# Altium PCB StepTMC5160.PcbDoc (part 3 of 3)
Units mm, origin at the board's own origin, x right, y up, seen from the top; angles counter-clockwise.
Board outline 109.42 x 88.01 mm, 4 copper layers (Component Side, GND, VCC, Bottom Layer), stack 0.778 mm thick; 190 components, 123 nets, 661 pads, 738 vias.
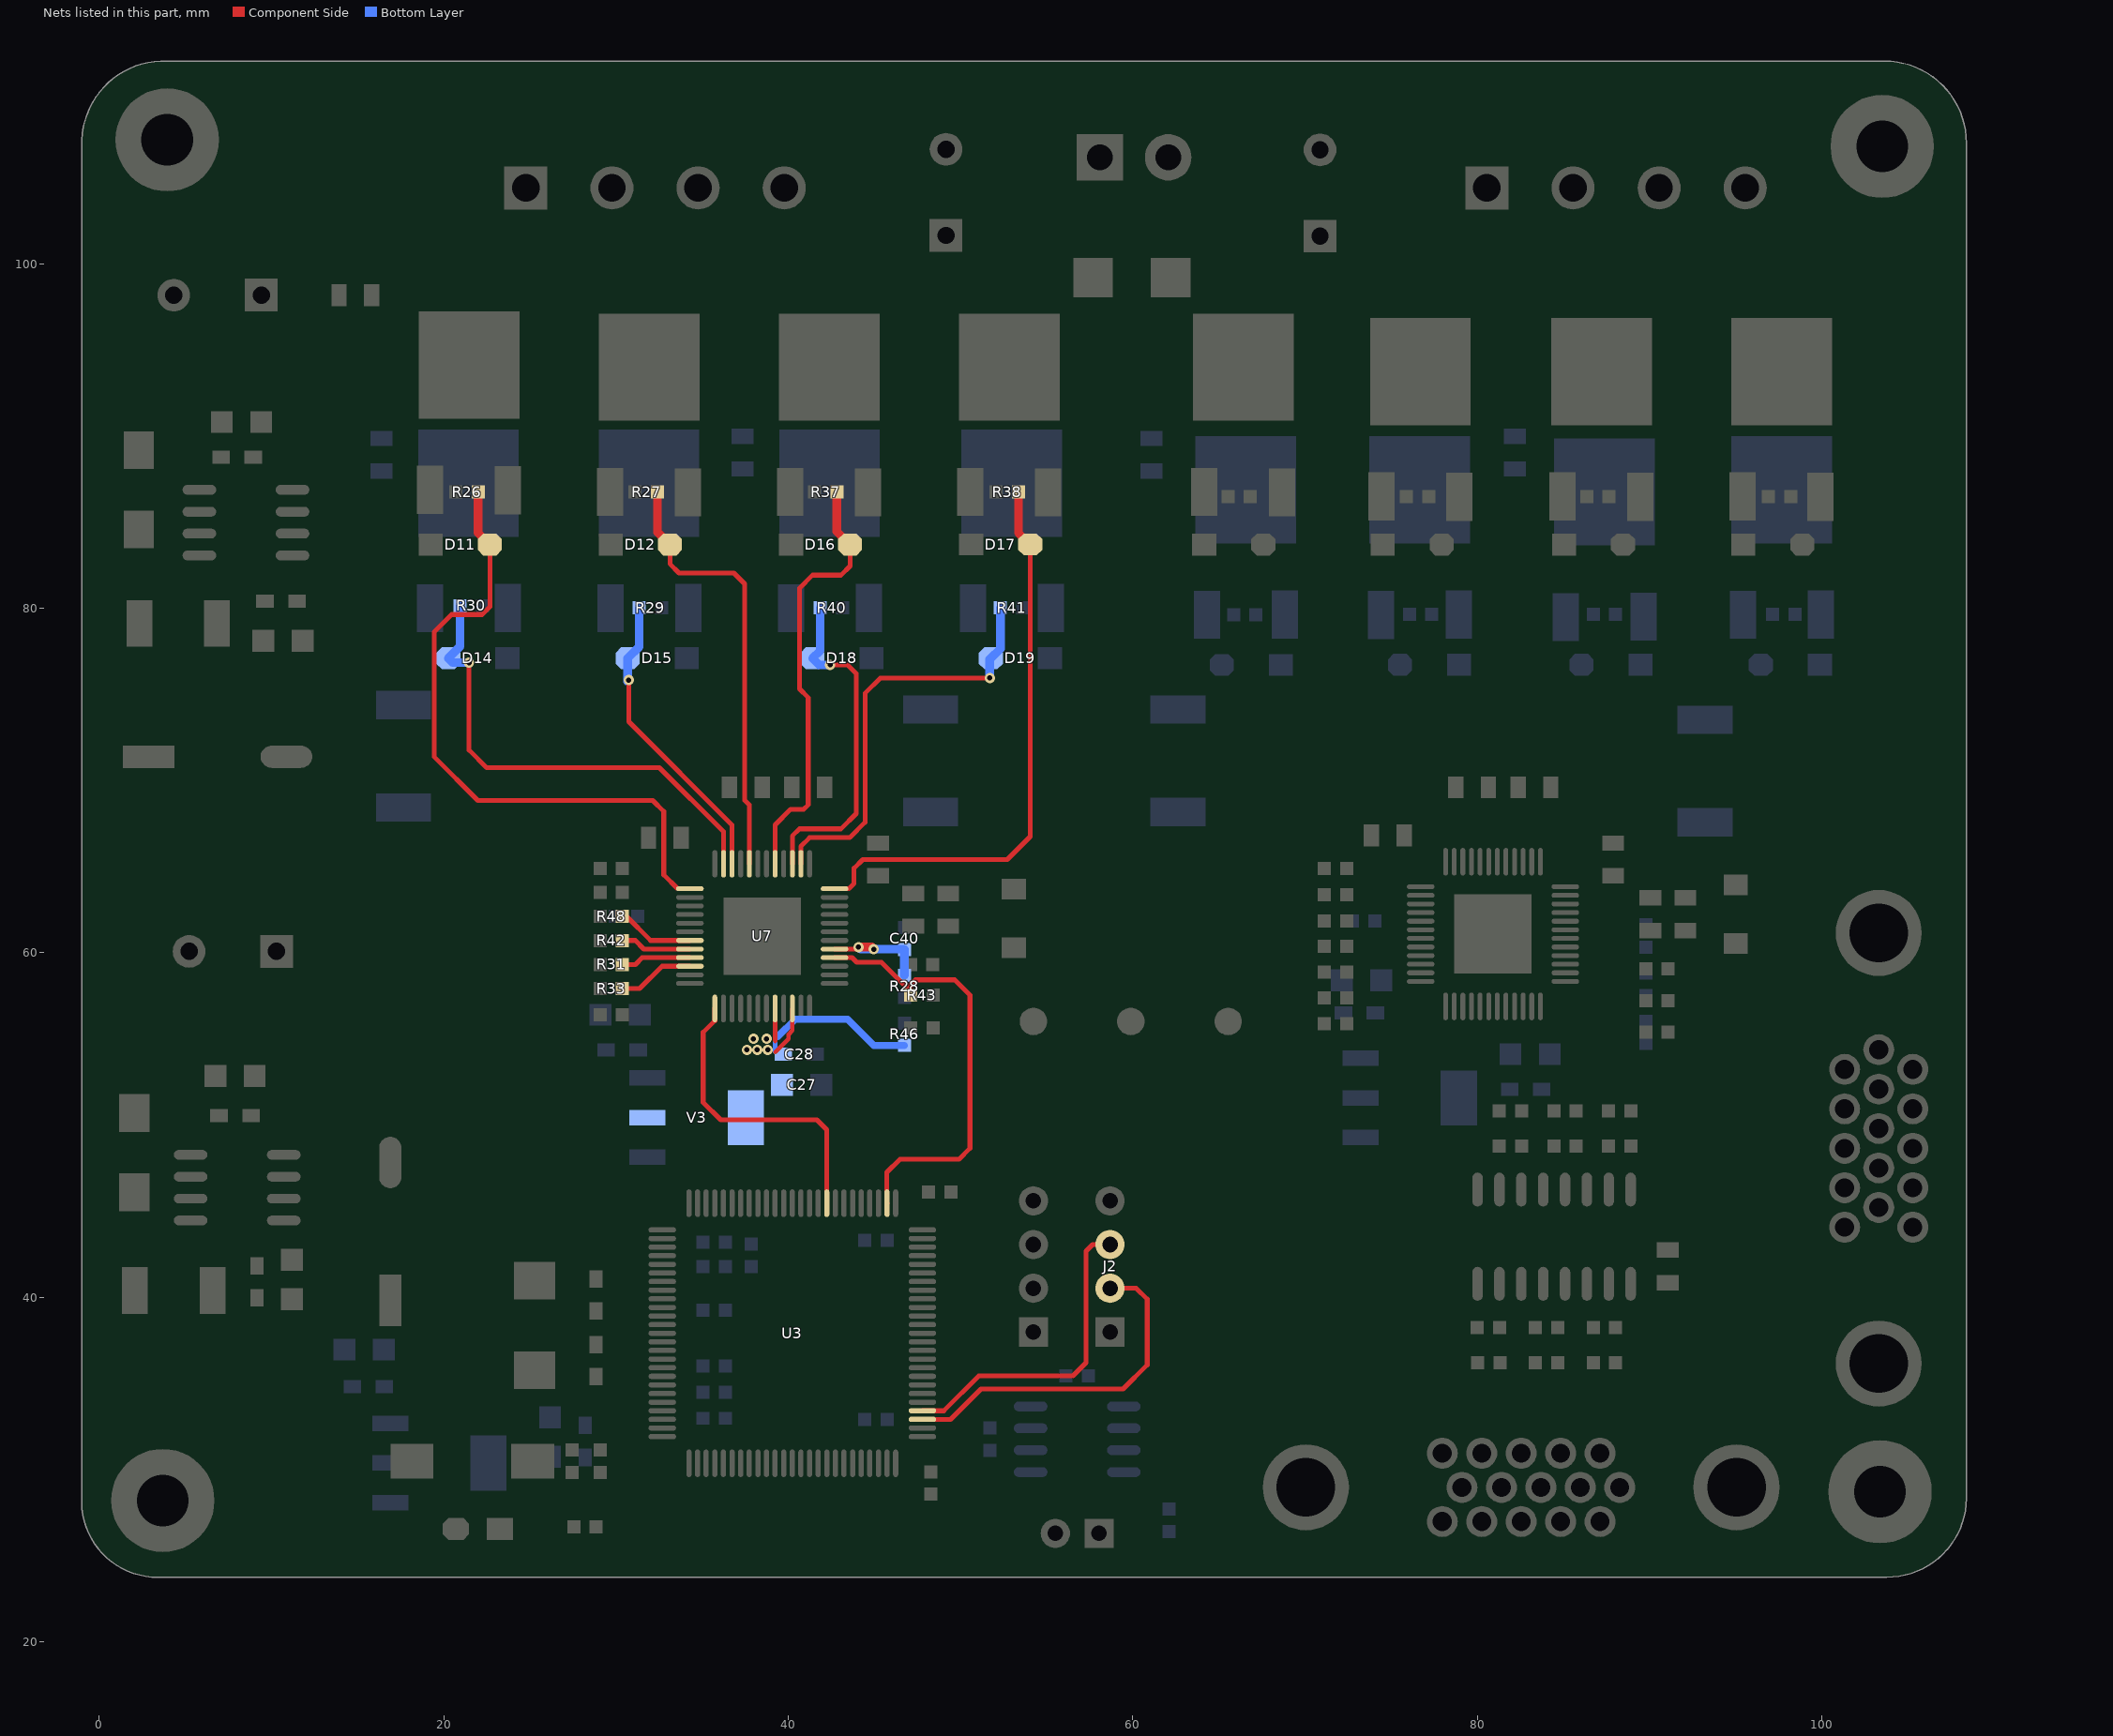
[diagram p5: the nets of this part, all layers, seen from the top]

## Via types
v1: diameter 0.6, hole 0.3, Component Side to Bottom Layer, 596 vias
v2: diameter 0.8, hole 0.4, Component Side to Bottom Layer, 60 vias
v3: diameter 0.762, hole 0.381, Component Side to Bottom Layer, 50 vias
v4: diameter 0.5, hole 0.5, Component Side to Bottom Layer, tented both sides, 32 vias

## Nets (pads, with @x,y where several pads share a name; then routed paths per layer and width w, separated by ;. In a path a pad name is that pad's centre, name@x,y a point inside that pad or via, vN(x,y) a via of type N, cw(c..) or ccw(c..) an arc to the next point about the centre after c; other vN are vias at no path point) (continued)
U2_DRV_ENN: R43.1 U3.77 U7.28 | length 25.9
  Component Side w0.279: U7.28@42.68,59.708 43.695,59.708 43.967,59.436 45.402,59.436 R43.1@47.102,57.737 ; U3.77@45.728,45.453 45.718,45.463 45.718,47.242 46.482,48.006 49.911,48.006 50.546,48.641 50.546,57.531 49.657,58.42 47.371,58.42 47.102,58.151 R43.1@47.102,57.737 ; R43.1@47.102,57.531 R43.1@47.102,57.737
U2_HA1: D16.2 R37.1 U7.41 | length 25.5
  Component Side w0.279: U7.41@39.23,65.159 39.23,67.424 40.132,68.326 40.894,68.326 41.148,68.58 41.148,74.803 40.64,75.311 40.64,81.153 41.402,81.915 43.053,81.915 43.582,82.444 D16.2@43.582,83.687
  Component Side w0.5: R37.1@42.814,86.741 42.814,84.455 D16.2@43.582,83.687
U2_HA2: D17.2 R38.1 U7.36 | length 33.4
  Component Side w0.279: U7.36@42.68,63.708 43.515,63.708 43.815,64.008 43.815,64.897 44.323,65.405 52.705,65.405 54.038,66.738 D17.2@54.038,83.687
  Component Side w0.5: R38.1@53.355,86.741 53.355,84.371 D17.2@54.038,83.687
U2_HB1: D11.2 R26.1 U7.1 | length 38.2
  Component Side w0.279: D11.2@22.669,83.687 22.669,80.073 22.225,79.629 20.447,79.629 19.431,78.613 19.431,71.374 21.971,68.834 32.131,68.834 32.766,68.199 32.766,64.516 33.574,63.708 U7.1@34.282,63.708
  Component Side w0.5: R26.1@21.986,86.741 21.986,84.371 D11.2@22.669,83.687
U2_HB2: D12.2 R27.1 U7.44 | length 26.2
  Component Side w0.279: D12.2@33.541,83.272 D12.2@33.126,83.687 33.126,82.571 33.655,82.042 36.83,82.042 37.465,81.407 37.465,68.847 37.732,68.58 U7.44@37.732,65.159
  Component Side w0.5: R27.1@32.4,86.741 32.4,84.413 D12.2@33.126,83.687
U2_LA1: D18.2 R40.1 U7.39 | length 20
  Component Side w0.279: U7.39@40.231,65.159 40.231,66.774 40.64,67.183 43.053,67.183 43.942,68.072 43.942,76.2 43.434,76.708 v1(42.418,76.708)
  Bottom Layer w0.5: R40.1@41.853,80.01 41.853,77.54 D18.2@41.402,77.089 41.783,76.708 v1(42.418,76.708)
U2_LA2: D19.2 R41.1 U7.38 | length 24.7
  Component Side w0.279: U7.38@40.731,65.159 40.731,66.174 41.233,66.675 43.561,66.675 44.45,67.564 44.45,75.057 45.339,75.946 v1(51.689,75.946)
  Bottom Layer w0.5: v1(51.689,75.946) 51.689,77.025 D19.2@51.752,77.089 52.309,77.645 R41.1@52.309,80.01
U2_LB1: D14.2 R30.1 U7.47 | length 28.3
  Component Side w0.279: v1(21.463,76.835) 21.463,71.755 22.479,70.739 32.512,70.739 36.231,67.02 U7.47@36.231,65.159
  Bottom Layer w0.5: R30.1@20.94,80.137 20.94,77.772 D14.2@20.256,77.089 20.511,76.835 v1(21.463,76.835)
U2_LB2: D15.2 R29.1 U7.46 | length 17.8
  Component Side w0.279: v1(30.734,75.819) 30.734,73.406 36.731,67.409 U7.46@36.731,65.159
  Bottom Layer w0.5: v1(30.734,75.819) 30.67,75.755 D15.2@30.67,77.089 31.339,77.757 R29.1@31.339,80.01
U2_SPI1_SCN: U3.84 U7.13 | length 17.8
  Component Side w0.279: U7.13@35.73,56.759 35.73,56.05 35.052,55.372 35.052,51.308 36.068,50.292 41.656,50.292 42.228,49.72 U3.84@42.228,45.453
U2_SRAH: R42.1 U7.8 | length 4.1
  Component Side w0.279: R42.1@30.368,60.706 31.115,60.706 31.613,60.208 U7.8@34.282,60.208
U2_SRAL: R48.1 U7.7 | length 4.5
  Component Side w0.279: R48.1@30.368,62.103 30.607,62.103 32.001,60.709 U7.7@34.282,60.709
U2_SRBH: R31.1 U7.9 | length 4.1
  Component Side w0.279: R31.1@30.368,59.309 31.115,59.309 31.514,59.708 U7.9@34.282,59.708
U2_SRBL: R33.1 U7.10 | length 4.5
  Component Side w0.279: R33.1@30.368,57.912 31.369,57.912 32.667,59.21 U7.10@34.282,59.21
U2_VCC: C40.2 R28.2 U7.29 | length 6.8
  Component Side w0.279: U7.29@42.68,60.208 43.952,60.208 v1(44.069,60.325) ; v1@44.831,60.325 v1(44.958,60.198)
  Component Side w0.5: v1(44.069,60.325) v1@44.831,60.325
  Bottom Layer w0.279: v1@44.831,60.325 v1(44.958,60.198)
  Bottom Layer w0.5: v1(44.069,60.325) 44.196,60.198 v1(44.958,60.198) 46.706,60.198 C40.2@46.736,60.168 R28.2@46.736,58.689
U2_VCC_IO: C27.2 C28.2 R46.2 U7.20 U7.22 V3.2 V3.4 | length 15.1
  Component Side w0.254: U7.20@39.23,56.759 39.23,54.877 39.243,54.864 ; 39.243,54.229 40.005,54.991 40.005,55.245 40.231,55.471 U7.22@40.231,56.759
  Bottom Layer w0.254: 39.497,55.118 39.383,55.118 39.243,54.978 ; 39.23,54.966 39.23,54.242 39.243,54.229 39.243,54.953 ; 39.23,54.966 39.243,54.953 ; 39.23,54.966 39.243,54.978 ; 39.243,54.953 39.243,54.978
  Bottom Layer w0.4: 39.383,55.118 40.399,56.134 43.434,56.134 44.958,54.61 R46.2@46.736,54.61
  other v1: 37.592,54.356 38.196,54.356 38.8,54.356 37.973,54.991 38.735,54.991
UART1_RX: J2.3 U3.54 | length 18.7
  Component Side w0.279: U3.54@47.778,33.403 49.024,33.403 51.054,35.433 56.515,35.433 57.277,36.195 57.277,42.672 57.658,43.053 J2.3@58.674,43.053
UART1_TX: J2.2 U3.53 | length 20.6
  Component Side w0.279: U3.53@47.778,32.903 49.413,32.903 51.181,34.671 59.436,34.671 60.833,36.068 60.833,39.878 60.198,40.513 J2.2@58.674,40.513
pads on no net: PAD1. PAD2. PAD3. PAD4. U3.1 U3.2 U3.3 U3.4 U3.5 U3.7 U3.8 U3.9 U3.15 U3.16 U3.17 U3.18 U3.22 U3.23 U3.24 U3.25 U3.29 U3.30 U3.31 U3.32 U3.33 U3.34 U3.35 U3.36 U3.37 U3.38 U3.39 U3.40 U3.41 U3.42 U3.43 U3.44 U3.45 U3.46 U3.47 U3.55 U3.56 U3.57 U3.58 U3.59 U3.60 U3.62 U3.63 U3.64 U3.65 U3.66 U3.67 U3.68 U3.71 U3.81 U3.82 U3.83 U3.85 U3.86 U3.87 U3.88 U3.89 U3.90 U3.91 U3.92 U3.93 U3.95 U3.96 U3.97 U3.98 U4.17 U4.18 U5.5 U6.4 U6.5 U6.6 U6.7 U6.8 U6.9 U6.10 U6.14 U6.15 U7.17 U7.18 U9.4 U9.5 U9.6 U9.7 U9.8 U9.9 U9.10 U9.14 U9.15
copper on no net:
  other v4: 3.683,25.894 103.378,26.402 5.383,26.494 1.883,26.594 105.078,27.002 101.578,27.102 1.383,28.194 5.883,28.194 101.078,28.702 105.578,28.702 1.983,29.794 5.283,29.794 101.678,30.302 104.978,30.302 3.683,30.494 103.378,31.002 103.505,104.507 3.937,104.888 105.205,105.107 101.705,105.207 5.637,105.488 2.137,105.588 101.205,106.807 105.705,106.807 1.637,107.188 6.137,107.188 101.805,108.407 105.105,108.407 2.237,108.788 5.537,108.788 103.505,109.107 3.937,109.488

## Polygon pours and split planes (outlines as drawn)
DGND on Component Side "Component Side-No Net 1" (solid, remove dead copper, pour order 238): 94.361,47.117 97.028,49.784 99.499,52.255 99.499,63.985 108.356,63.985 108.382,64.011 108.331,63.96 108.331,33.528 108.077,33.274 97.79,33.274 97.79,24.003 97.663,23.876 67.142,23.876 67.142,47.117
DGND on Component Side "Component Side-No Net 1" (solid, remove dead copper, pour order 236): 22.225,36.068 22.225,35.941 21.082,34.798 20.672,34.388 15.621,34.388 13.687,34.388 12.446,33.147 12.446,29.337 12.446,28.956 13.462,27.94 22.733,27.94 24.13,27.94 24.638,28.448
DGND on Component Side "Component Side-No Net 1" (solid, remove dead copper, pour order 230): 22.098,46.482 52.339,46.482 52.339,36.688 53.34,35.687 59.944,35.687 61.087,34.544 61.087,29.21 61.087,28.702 60.579,28.194 60.325,27.94 45.974,27.94 22.479,27.94 22.098,28.321
DGND on Component Side "Component Side-No Net 1" (solid, remove dead copper, pour order 226): 23.876,66.167 94.742,66.167 94.742,47.151 93.379,48.514 23.876,48.514
+U2_24V on Component Side "Component Side-No Net 1" (solid, remove dead copper, pour order 222): 94.234,61.292 96.901,61.292 97.917,62.308 98.171,62.562 99.482,62.562 99.482,59.006 94.361,59.006 94.234,59.006
+U2_24V on Component Side "Component Side-No Net 1" (solid, remove dead copper, pour order 220): 52.324,60.833 54.991,60.833 56.007,61.849 56.261,62.103 58.166,62.103 58.166,58.801 57.912,58.547 52.451,58.547 52.324,58.547
+12V on Component Side "Component Side-No Net 1" (solid, pour order 216): 68.326,66.294 71.501,66.294 71.501,64.516 70.739,64.516 69.977,64.516 69.596,64.135 69.342,63.881 69.342,63.246 68.199,63.246 68.072,63.246 68.072,63.373 68.072,66.294
+12V on Component Side "Component Side-No Net 1" (solid, pour order 212): 24.765,65.532 29.464,65.532 29.464,64.516 28.067,64.516 27.305,64.516 26.543,63.754 26.543,63.119 24.257,63.119 24.257,65.532
U1_VCC_IO on Component Side "Component Side-No Net 1" (solid, remove dead copper, pour order 208): 80.264,55.626 82.55,55.626 82.55,54.483 82.296,54.229 81.534,53.467 80.264,53.467
+U2_24V on Component Side "Component Side-+U2_24V 3" (solid, remove dead copper, pour order 0): 15.367,99.06 42.545,99.06 44.069,100.584 44.069,102.235 45.085,103.251 52.324,103.251 53.975,101.6 53.975,98.298 56.134,96.139 64.008,96.139 65.786,97.917 65.786,101.219 67.945,103.378 72.531,103.378 76.369,99.06 105.664,99.06 105.664,89.408 18.034,89.408 15.367,92.075
+U2_24V on Component Side "Component Side-+U2_24V 2" (solid, pour order 2): 70.866,103.378 74.168,103.378 76.073,101.473 76.073,100.076 77.47,98.679 77.216,98.425 77.216,97.409 72.771,97.409 72.39,97.79
+U2_24V on Component Side "Component Side-+U2_24V 1" (solid, pour order 4): 16.256,99.06 15.494,98.298 15.494,91.186 17.272,89.408 18.415,89.408 21.242,92.235
+U2_24V on Component Side "Component Side-+U2_24V" (solid, remove dead copper, pour order 8): 61.087,100.33 60.833,100.076 60.833,93.345 61.595,94.107 65.532,94.107 65.532,96.647 66.294,97.409 66.167,97.536 66.167,100.838 63.754,103.251 63.754,105.283
NetD11_1 on Component Side "Component Side-NetD11_1" (solid, pour order 36): 18.288,88.138 20.193,88.138 21.082,87.249 21.082,84.201 19.939,83.058 18.288,83.058
NetD12_1 on Component Side "Component Side-NetD12_1" (solid, pour order 44): 28.702,88.138 30.607,88.138 31.496,87.249 31.496,84.201 30.353,83.058 28.702,83.058
NetD16_1 on Component Side "Component Side-NetD16_1" (solid, pour order 46): 39.116,88.138 41.021,88.138 41.91,87.249 41.91,84.201 40.767,83.058 39.116,83.058
NetD17_1 on Component Side "Component Side-NetD17_1" (solid, pour order 48): 49.657,88.138 51.562,88.138 52.451,87.249 52.451,84.201 51.308,83.058 49.657,83.058
NetD1_1 on Component Side "Component Side-NetD1_1" (solid, pour order 50): 63.119,87.884 65.024,87.884 65.913,86.995 65.913,83.947 64.77,82.804 63.119,82.804
NetD2_1 on Component Side "Component Side-NetD2_1" (solid, pour order 52): 73.479,87.878 75.384,87.878 76.273,86.989 76.273,83.941 75.13,82.798 73.479,82.798
NetD7_1 on Component Side "Component Side-NetD7_1" (solid, pour order 54): 83.947,87.884 85.852,87.884 86.741,86.995 86.741,83.947 85.598,82.804 83.947,82.804
NetD8_1 on Component Side "Component Side-NetD8_1" (solid, pour order 56): 94.488,87.884 96.393,87.884 97.282,86.995 97.282,83.947 96.139,82.804 94.488,82.804
U2_BMB1 on Component Side "Component Side-U2_BMB1" (solid, remove dead copper, pour order 62): 22.953,88.392 26.924,88.392 26.924,84.582 23.749,84.582 22.953,85.378
U2_BMB2 on Component Side "Component Side-U2_BMB2" (solid, pour order 74): 33.274,88.138 35.433,88.138 35.56,88.011 36.576,86.995 37.338,86.995 37.338,84.201 34.417,84.201 33.274,85.344
U1_BMB2 on Component Side "Component Side-U1_BMB2" (solid, pour order 80): 78.178,87.878 80.337,87.878 80.464,87.751 81.48,86.735 82.242,86.735 82.242,83.941 79.321,83.941 78.178,85.084
U2_VCC_IO on Component Side "Component Side-U2_VCC_IO" (solid, remove dead copper, pour order 114): 38.024,55.372 40.231,55.372 40.231,53.975 37.262,53.975 37.262,54.61
DGND on Component Side "Component Side-No Net" (solid, remove dead copper, pour order 136): 8.763,91.694 13.081,91.694 13.081,87.249 13.081,82.169 8.763,82.169 8.763,84.836
+12V on Component Side "Component Side-No Net" (solid, remove dead copper, pour order 138): 4.776,84.709 7.697,84.709 8.205,84.201 8.205,81.661 8.205,81.484 7.697,80.976 7.697,80.01 7.697,77.47 4.953,77.47 4.953,80.264 6.35,81.661 6.681,81.661 6.935,81.661 7.316,82.042 7.443,82.169 7.443,83.566 7.062,83.947 4.776,83.947
+12V on Component Side "Component Side-No Net" (solid, remove dead copper, pour order 140): 6.477,79.756 7.62,79.756 8.763,80.899 10.033,80.899 10.033,77.47 7.112,77.47 6.477,78.105
DGND on Component Side "Component Side-No Net" (solid, remove dead copper, pour order 142): 10.922,82.804 10.922,79.756 10.922,76.581 13.081,76.581 13.081,82.66
NetD3_2 on Component Side "Component Side-No Net" (solid, pour order 144): 6.731,86.106 6.858,85.979 6.858,85.471 6.858,85.344 6.731,85.217 4.826,85.217 4.318,85.217 3.81,84.709 3.81,83.439 3.81,77.597 0.889,77.597 0.889,86.106
DGND on Component Side "d" (solid, pour order 146): 4.318,83.566 6.731,83.566 6.985,83.312 6.985,83.058 5.715,81.788 4.318,81.788
+12V on Component Side "d" (solid, pour order 154): 8.509,77.724 8.509,76.2 7.747,75.438 7.239,74.93 0.889,74.93 0.889,70.612 5.334,70.612 7.493,72.771 9.525,74.803 10.033,75.311 10.033,77.863
DGND on Component Side "d" (solid, pour order 156): 10.922,76.581 10.922,74.168 8.636,71.882 8.636,70.485 12.573,70.485 13.081,70.485 13.081,70.866 13.081,71.501 13.081,76.581
DGND on Component Side "d" (solid, pour order 158): 8.636,71.882 8.636,57.023 13.081,57.023 13.081,70.485
+12V on Component Side "d" (solid, pour order 160): 0.889,70.866 0.889,57.15 6.985,57.15 6.985,72.771
+12V on Component Side "d" (solid, pour order 162): 4.191,57.531 4.953,56.769 5.715,56.007 5.715,50.038 4.699,49.022 4.318,48.641 4.318,47.879 6.858,47.879 6.985,48.006 7.493,48.514 7.493,50.038 7.493,53.594 6.985,54.102 6.985,57.15 6.985,57.658
NetD6_2 on Component Side "Component Side-No Net" (solid, pour order 164): 6.223,47.498 6.35,47.371 6.35,46.863 6.35,46.736 6.223,46.609 4.318,46.609 3.81,46.609 3.302,46.101 3.302,44.831 3.302,38.989 0.381,38.989 0.381,47.498
DGND on Component Side "d" (solid, remove dead copper, pour order 166): 8.636,57.594 13.081,57.595 13.081,44.259 8.636,44.259 8.636,46.926
24V on Component Side "d" (solid, pour order 168): 12.954,97.282 14.351,97.282 14.351,100.076 14.351,103.251 9.525,103.251 2.794,103.251 2.794,97.79 2.794,96.393 5.715,96.393 6.731,96.393 6.731,99.949 6.731,100.203 7.493,100.965 10.16,100.965 12.065,100.965 12.954,100.076
DGND on Component Side "d" (solid, pour order 170): 8.382,99.568 11.557,99.568 11.557,98.933 11.557,94.361 12.065,93.853 13.081,92.837 13.081,91.694 13.081,90.932 12.827,91.186 8.763,91.186 8.763,92.456 8.382,92.964 8.382,94.742
24V on Component Side "d" (solid, pour order 172): 2.794,97.155 2.794,92.329 5.207,92.329 5.588,92.329 6.35,91.567 6.477,91.44 6.477,88.773 4.699,86.995 4.699,86.487 7.239,86.487 7.747,86.995 7.747,90.678 7.747,92.202 7.366,92.583 6.731,93.218 6.731,96.393 6.731,97.028 6.604,97.155
+5V on Component Side "d" (solid, pour order 174): 4.191,45.974 4.445,46.101 4.572,46.101 7.112,46.101 7.747,45.466 7.747,44.831 7.747,38.989 5.842,38.989 4.699,38.989 4.699,42.037 5.588,42.926 5.969,42.926 6.985,43.942 6.985,44.831 6.477,45.339 4.318,45.339 4.191,45.466
DGND on Component Side "d" (solid, pour order 176): 3.81,44.958 6.223,44.958 6.477,44.704 6.477,44.45 5.207,43.18 3.81,43.18
+5V on Component Side "Bottom Layer-DGND 2" (solid, pour order 178): 6.985,41.402 7.112,41.402 7.747,40.767 7.874,40.64 10.16,40.64 12.192,40.64 13.081,40.64 13.208,40.767 14.732,42.291 18.542,42.291 18.542,37.846 5.842,37.846 4.699,38.989 4.699,41.021
DGND on Component Side "Bottom Layer-DGND 2" (solid, pour order 180): 8.763,41.275 12.192,41.275 12.573,41.656 13.081,42.164 13.081,44.259 13.081,45.339 12.319,46.101 12.192,45.974 8.636,45.974 8.636,41.275
DGND on Component Side "Bottom Layer-DGND 2" (solid, pour order 182): 13.081,42.164 15.24,44.323 15.367,44.45 19.431,44.45 20.32,45.339 20.32,46.863 20.32,49.784 19.431,50.673 14.605,50.673 13.589,50.673 12.573,51.689 10.706,49.822 10.706,48.26
DGND on Bottom Layer "Component Side-No Net 1" (solid, remove dead copper, pour order 240): 67.183,47.117 94.361,47.117 99.464,52.22 99.464,63.985 108.356,63.985 108.382,64.011 108.382,33.277 97.793,33.277 97.663,33.147 97.663,23.876 67.175,23.876
DGND on Bottom Layer "Component Side-No Net 1" (solid, remove dead copper, pour order 228): 22.352,46.482 52.197,46.482 52.324,46.609 52.339,46.594 52.339,36.688 53.213,35.814 53.34,35.687 59.309,35.687 59.944,35.687 60.833,34.798 61.087,34.544 61.087,29.21 59.817,27.94 57.912,27.94 22.86,27.94 22.352,28.448
DGND on Bottom Layer "Component Side-No Net 1" (solid, remove dead copper, pour order 218): 23.876,66.167 23.876,48.964 23.876,48.514 94.742,48.514 94.742,66.167
U1_VCC_IO on Bottom Layer "Component Side-No Net 1" (solid, pour order 206): 77.47,52.832 80.264,55.626 82.55,55.626 82.55,51.816 82.423,51.689 80.645,49.911 80.01,49.911 77.47,49.911
U1_VCC_IO on Bottom Layer "Component Side-No Net 1" (solid, pour order 204): 72.136,51.943 75.057,51.943 75.692,51.943 76.454,52.705 76.962,53.213 77.923,53.213 80.01,53.213 80.01,49.911 76.835,49.911 75.692,51.054 72.136,51.054
U1_5VOUT on Bottom Layer "Component Side-No Net 1" (solid, remove dead copper, pour order 202): 73.66,62.357 74.422,62.357 74.422,60.96 74.422,60.325 75.184,59.563 75.184,56.261 75.184,55.118 74.422,54.356 74.422,53.34 72.263,53.34 72.136,53.34 72.136,54.356 72.136,54.483 72.644,54.991 73.533,55.88 73.533,57.531 73.66,57.658 73.66,59.309
DGND on Bottom Layer "Component Side-No Net 1" (solid, pour order 200): 72.263,62.357 73.152,62.357 73.152,61.468
+5V on Bottom Layer "Component Side-No Net 1" (solid, pour order 196): 16.002,35.179 16.002,33.408 15.741,33.147 15.741,32.131 17.907,32.131 18.542,32.766 18.542,35.179
3.3V on Bottom Layer "Component Side-No Net 1" (solid, remove dead copper, pour order 192): 25.4,31.369 30.988,31.369 31.623,30.734 32.258,30.099 32.258,27.559 28.829,27.559 24.892,27.559 23.749,28.702 23.749,31.115
3.3V on Bottom Layer "Component Side-No Net 1" (solid, remove dead copper, pour order 190): 23.368,31.369 28.575,31.369 28.575,30.226 25.273,30.226 23.749,28.702 23.368,28.702
3.3V on Bottom Layer "Component Side-No Net 1" (solid, remove dead copper, pour order 188): 15.748,30.861 18.034,30.861 18.669,30.861 18.923,31.115 19.812,32.004 21.59,32.004 23.749,32.004 23.749,28.702 21.463,28.702 19.812,28.702 18.669,29.845 15.748,29.845
DGND on Bottom Layer "Component Side-No Net 1" (solid, remove dead copper, pour order 186): 14.097,34.29 15.24,34.29 15.24,36.322 15.24,37.592 14.351,38.481 13.589,39.243 13.589,40.132 13.589,41.783 14.732,42.926 16.129,44.323 20.32,44.323 20.32,49.784 19.431,50.673 14.097,50.673 13.843,50.673 12.827,49.657 11.684,48.514 11.684,35.433 11.684,35.179 12.573,34.29
+5V on Bottom Layer "Component Side-No Net 1" (solid, pour order 184): 14.605,40.513 14.605,39.243 16.002,37.846 16.002,34.671 16.383,34.29 17.526,34.29 18.161,34.29 18.288,34.417 18.542,34.671 18.542,40.513
DGND on Bottom Layer "Bottom Layer-DGND" (solid, remove dead copper, pour order 132): 60.96,69.85 65.151,69.85 65.151,66.548 60.96,66.548
+U2_24V on Bottom Layer "Bottom Layer-+U2_24V 3" (solid, pour order 6): 15.494,92.583 16.891,92.583 17.399,92.075 17.399,89.408 16.002,89.408 15.494,89.408
U2_BMB1 on Bottom Layer "Bottom Layer-U2_BMB1" (solid, remove dead copper, pour order 10): 19.431,90.297 20.574,91.44 20.574,103.378 23.241,106.045 25.654,106.045 26.543,105.156 26.543,100.965 24.257,98.679 24.257,89.916 19.558,89.916 19.431,89.789
U2_BMB2 on Bottom Layer "Bottom Layer-U2_BMB2" (solid, remove dead copper, pour order 14): 28.114,106.045 28.067,105.998 28.067,87.376 29.718,85.725 30.099,86.106 33.909,86.106 33.909,89.916 31.416,92.409 31.416,106.045
U2_BMA1 on Bottom Layer "Bottom Layer-U2_BMA1" (solid, remove dead copper, pour order 16): 40.005,87.884 39.751,88.053 39.751,91.44 38.735,92.456 35.052,92.456 33.114,94.394 33.114,106.045 36.416,106.045 36.449,106.012 36.449,97.536 38.862,95.123 41.656,95.123 45.339,91.44 45.339,89.408
U2_BMA2 on Bottom Layer "Bottom Layer-U2_BMA2" (solid, remove dead copper, pour order 18): 38.114,106.045 38.114,98.411 40.005,96.52 43.561,96.52 49.911,90.17 49.911,88.519 55.626,88.519 55.753,88.646 55.753,90.678 47.244,99.187 44.069,99.187 41.416,101.84 41.416,106.045
U1_BMA2 on Bottom Layer "Bottom Layer-U1_BMA2 1" (solid, remove dead copper, pour order 20): 94.742,88.265 94.742,101.831 93.907,102.666 93.907,106.045 97.209,106.045 97.209,103.197 98.806,101.6 98.806,88.265
U1_BMA1 on Bottom Layer "Bottom Layer-U1_BMA1" (solid, remove dead copper, pour order 22): 84.455,88.646 84.328,88.773 84.328,90.678 86.367,92.717 87.129,92.717 88.907,94.495 88.907,106.045 92.209,106.045 92.209,92.336 90.297,90.424 90.297,88.519 90.17,88.392
U1_BMB2 on Bottom Layer "Bottom Layer-U1_BMB2" (solid, remove dead copper, pour order 24): 79.502,87.503 79.629,87.63 79.629,91.059 80.899,92.329 83.359,92.329 87.209,96.179 87.209,105.069 86.233,106.045 83.907,106.045 83.907,98.512 78.994,93.599 75.438,93.599 73.787,91.948 73.787,89.281
U1_BMA2 on Bottom Layer "Bottom Layer-U1_BMA2" (solid, pour order 26): 97.536,94.361 97.536,93.091 100.584,90.043 100.584,88.392 97.536,88.392 97.155,88.773
U1_BMB1 on Bottom Layer "Bottom Layer-U1_BMB1" (solid, remove dead copper, pour order 28): 63.373,87.63 63.373,92.075 69.342,98.044 75.438,98.044 78.994,101.6 78.994,105.958 78.907,106.045 82.209,106.045 82.209,100.37 76.962,95.123 72.898,95.123 69.342,91.567 69.342,88.519
+U2_24V on Bottom Layer "Bottom Layer-+U2_24V 2" (solid, pour order 30): 35.941,89.408 35.941,91.313 38.735,91.313 38.735,89.408
+U2_24V on Bottom Layer "Bottom Layer-+U2_24V 1" (solid, pour order 32): 59.69,89.408 59.69,91.313 62.484,91.313 62.484,89.408
+U2_24V on Bottom Layer "Bottom Layer-+U2_24V" (solid, pour order 34): 80.772,89.535 80.772,91.44 83.566,91.44 83.566,89.535
NetC37_1 on Bottom Layer "Bottom Layer-NetC37_1 1" (solid, remove dead copper, pour order 60): 36.83,81.407 39.716,81.407 39.716,77.47 39.716,76.454 40.351,75.819 46.609,75.819 46.609,81.407 50.13,81.407 50.13,77.343 50.13,73.152 36.83,73.152
U2_BMB2 on Bottom Layer "Bottom Layer-U2_BMB2 1" (solid, pour order 72): 33.274,88.9 34.671,88.9 35.56,88.011 36.576,86.995 37.338,86.995 37.338,84.201 34.417,84.201 33.274,85.344
NetC37_1 on Bottom Layer "Bottom Layer-NetC37_1" (solid, remove dead copper, pour order 76): 36.703,88.646 38.227,88.646 38.862,88.011 38.862,80.518 37.973,80.518 37.973,86.995 37.338,87.63 36.703,87.63
U1_BMB2 on Bottom Layer "Bottom Layer-U1_BMB2 1" (solid, remove dead copper, pour order 78): 78.178,88.646 79.569,88.646 80.464,87.751 81.48,86.735 82.242,86.735 82.242,83.941 79.321,83.941 78.178,85.084
NetC3_1 on Bottom Layer "Bottom Layer-NetC3_1" (solid, remove dead copper, pour order 82): 81.534,88.646 83.058,88.646 83.566,88.138 83.566,80.518 82.804,80.518 82.804,86.995 82.169,87.63 81.534,87.63
NetD14_1 on Bottom Layer "Bottom Layer-NetD14_1" (solid, pour order 84): 21.844,80.645 22.733,81.534 24.638,81.534 24.638,76.327 22.86,76.327 21.844,77.343
NetD15_1 on Bottom Layer "Bottom Layer-NetD15_1" (solid, pour order 86): 32.243,80.518 33.132,81.407 35.037,81.407 35.037,76.2 33.259,76.2 32.243,77.216
NetD18_1 on Bottom Layer "Bottom Layer-NetD18_1" (solid, pour order 88): 42.757,80.518 43.646,81.407 45.551,81.407 45.551,76.2 43.773,76.2 42.757,77.216
NetD19_1 on Bottom Layer "Bottom Layer-NetD19_1" (solid, pour order 90): 53.213,80.518 54.102,81.407 56.007,81.407 56.007,76.2 54.229,76.2 53.213,77.216
NetD4_1 on Bottom Layer "Bottom Layer-NetD4_1" (solid, pour order 92): 66.748,80.131 67.637,81.02 69.542,81.02 69.542,75.813 67.764,75.813 66.748,76.829
NetD5_1 on Bottom Layer "Bottom Layer-NetD5_1" (solid, pour order 94): 76.962,80.137 77.851,81.026 79.756,81.026 79.756,75.819 77.978,75.819 76.962,76.835
NetD9_1 on Bottom Layer "Bottom Layer-NetD9_1" (solid, pour order 96): 87.63,80.137 88.519,81.026 90.424,81.026 90.424,75.819 88.646,75.819 87.63,76.835
NetD10_1 on Bottom Layer "Bottom Layer-NetD10_1" (solid, pour order 98): 98.044,80.137 98.933,81.026 100.838,81.026 100.838,75.819 99.06,75.819 98.044,76.835
NetC36_1 on Bottom Layer "Bottom Layer-NetC36_1" (solid, pour order 58): 15.748,81.407 18.796,81.407 18.796,77.47 18.796,76.454 19.431,75.819 25.527,75.819 25.527,81.407 29.21,81.407 29.21,77.343 29.21,73.406 15.748,73.406
U2_5VOUT on Bottom Layer "Bottom Layer-U2_5VOUT" (solid, pour order 100): 30.734,57.404 31.877,57.404 32.893,56.388 32.893,52.197 32.766,52.324 30.734,52.324
U2_VCC_IO on Bottom Layer "Bottom Layer-U2_VCC_IO 1" (solid, pour order 102): 30.734,50.927 35.179,50.927 36.322,52.07 38.608,52.07 38.608,48.768 36.449,48.768 35.306,49.911 30.734,49.911
U2_VCC_IO on Bottom Layer "Bottom Layer-U2_VCC_IO" (solid, remove dead copper, pour order 104): 40.197,55.372 40.197,51.627 38.354,49.784 36.322,49.784 36.322,53.721 37.973,55.372
DGND on Bottom Layer "Bottom Layer-DGND 1" (solid, remove dead copper, pour order 106): 46.482,69.723 49.784,69.723 51.181,71.12 52.959,71.12 52.959,66.802 46.482,66.802
DGND on Bottom Layer "Bottom Layer-DGND" (solid, remove dead copper, pour order 108): 14.224,70.231 19.431,70.231 19.431,65.659 14.224,65.659
NetC2_1 on Bottom Layer "Bottom Layer-NetC37_1 1" (solid, remove dead copper, pour order 116): 60.452,81.026 63.793,81.026 63.793,77.089 63.793,76.073 64.428,75.438 70.866,75.438 70.866,81.026 74.207,81.026 74.207,76.962 74.207,72.771 60.452,72.771
NetC3_1 on Bottom Layer "Bottom Layer-NetC37_1 1" (solid, remove dead copper, pour order 118): 81.569,80.899 84.455,80.899 84.455,76.962 84.455,75.946 85.09,75.311 91.528,75.311 91.528,80.899 94.869,80.899 94.869,76.835 94.869,72.644 81.569,72.644
DGND on Bottom Layer "Bottom Layer-DGND 1" (solid, remove dead copper, pour order 130): 91.313,69.625 94.234,69.625 95.631,71.022 97.409,71.022 97.409,66.704 91.313,66.704
DGND on Bottom Layer "Component Side-No Net 1" (solid, remove dead copper, pour order 242): 0.635,103.124 0.762,103.251 12.446,103.251 12.954,103.251 13.081,103.124 13.081,92.837 13.081,51.181 13.589,50.673 19.431,50.673 20.32,49.784 20.32,44.323 20.32,38.1 1.016,38.1 0.508,38.1
DGND on GND (split plane): 103.91,111.243 104.187,111.215 104.462,111.17 104.733,111.107 104.999,111.026 105.26,110.928 105.513,110.813 105.759,110.682 105.995,110.535 106.221,110.373 106.436,110.196 106.639,110.006 106.83,109.803 107.006,109.588 107.168,109.361 107.315,109.125 107.447,108.88 107.561,108.626 107.659,108.366 107.74,108.099 107.803,107.828 107.849,107.554 107.876,107.277 107.885,107.015 107.883,106.999 107.883,28.321 107.884,28.312 107.876,28.084 107.85,27.818 107.807,27.553 107.746,27.292 107.668,27.036 107.574,26.785 107.463,26.541 107.337,26.305 107.195,26.077 107.039,25.859 106.869,25.652 106.686,25.457 106.49,25.273 106.283,25.103 106.065,24.947 105.838,24.806 105.601,24.68 105.357,24.569 105.107,24.475 104.85,24.397 104.589,24.336 104.325,24.292 104.058,24.266 103.79,24.257 103.777,24.258 103.759,24.259 67.05,24.259 67.05,33.528 67.05,47.752 67.041,47.85 67.012,47.944 66.966,48.031 66.903,48.107 66.827,48.17 66.74,48.216 66.646,48.245 66.548,48.254 -0.506,48.254 -0.506,106.807 -0.508,106.827 -0.506,106.827 -0.512,106.998 -0.502,107.276 -0.475,107.553 -0.43,107.828 -0.366,108.1 -0.286,108.366 -0.187,108.627 -0.072,108.881 0.059,109.127 0.206,109.363 0.368,109.59 0.545,109.805 0.736,110.008 0.939,110.199 1.154,110.376 1.381,110.538 1.617,110.685 1.863,110.816 2.117,110.931 2.378,111.03 2.644,111.11 2.916,111.174 3.191,111.219 3.468,111.246 3.563,111.25 15.748,111.25 103.632,111.25 103.649,111.251
DGND on GND (split plane): 66.046,33.528 66.046,24.259 3.051,24.259 2.813,24.285 2.54,24.334 2.271,24.403 2.008,24.491 1.752,24.597 1.504,24.721 1.265,24.862 1.037,25.02 0.821,25.194 0.618,25.383 0.429,25.586 0.255,25.802 0.097,26.03 -0.044,26.269 -0.168,26.517 -0.274,26.773 -0.362,27.036 -0.431,27.305 -0.48,27.578 -0.51,27.853 -0.519,28.13 -0.51,28.407 -0.509,28.409 -0.509,28.411 -0.506,28.448 -0.506,47.25 66.046,47.25
+12V on VCC (split plane): 74.046,63.119 74.047,63.109 74.047,62.751 2.407,62.751 2.407,66.3 74.046,66.3
+U2_24V on VCC (split plane): 103.91,111.243 104.187,111.215 104.462,111.17 104.733,111.107 104.999,111.026 105.26,110.928 105.513,110.813 105.759,110.682 105.995,110.535 106.221,110.373 106.436,110.196 106.639,110.006 106.83,109.803 107.006,109.588 107.168,109.361 107.315,109.125 107.447,108.88 107.561,108.626 107.659,108.366 107.74,108.099 107.803,107.828 107.849,107.554 107.876,107.277 107.885,107.015 107.883,106.999 107.883,28.321 107.884,28.312 107.876,28.084 107.85,27.818 107.807,27.553 107.746,27.292 107.668,27.036 107.574,26.785 107.463,26.541 107.337,26.305 107.195,26.077 107.039,25.859 106.869,25.652 106.686,25.457 106.49,25.273 106.283,25.103 106.065,24.947 105.838,24.806 105.601,24.68 105.357,24.569 105.107,24.475 104.85,24.397 104.589,24.336 104.325,24.292 104.058,24.266 103.79,24.257 103.777,24.258 103.759,24.259 67.431,24.259 67.431,33.153 94.996,33.153 95.094,33.162 95.188,33.191 95.275,33.237 95.351,33.3 95.414,33.376 95.46,33.463 95.489,33.557 95.498,33.655 95.498,52.451 95.489,52.549 95.46,52.643 95.414,52.73 95.351,52.806 95.275,52.869 95.188,52.915 95.094,52.944 94.996,52.953 67.945,52.953 67.847,52.944 67.753,52.915 67.666,52.869 67.59,52.806 62.911,48.127 -0.506,48.127 -0.506,106.807 -0.508,106.827 -0.506,106.827 -0.512,106.998 -0.502,107.276 -0.475,107.553 -0.43,107.828 -0.366,108.1 -0.286,108.366 -0.187,108.627 -0.072,108.881 0.059,109.127 0.206,109.363 0.368,109.59 0.545,109.805 0.736,110.008 0.939,110.199 1.154,110.376 1.381,110.538 1.617,110.685 1.863,110.816 2.117,110.931 2.378,111.03 2.644,111.11 2.916,111.174 3.191,111.219 3.468,111.246 3.563,111.25 15.748,111.25 103.632,111.25 103.649,111.251
3.3V on VCC (split plane): 94.494,34.157 66.929,34.157 66.831,34.148 66.737,34.119 66.65,34.073 66.574,34.01 66.511,33.934 66.465,33.847 66.436,33.753 66.427,33.655 66.427,24.259 3.051,24.259 2.813,24.285 2.54,24.334 2.271,24.403 2.008,24.491 1.752,24.597 1.504,24.721 1.265,24.862 1.037,25.02 0.821,25.194 0.618,25.383 0.429,25.586 0.255,25.802 0.097,26.03 -0.044,26.269 -0.168,26.517 -0.274,26.773 -0.362,27.036 -0.431,27.305 -0.48,27.578 -0.51,27.853 -0.519,28.13 -0.51,28.407 -0.509,28.409 -0.509,28.411 -0.506,28.448 -0.506,47.123 63.119,47.123 63.217,47.132 63.311,47.161 63.398,47.207 63.474,47.27 68.153,51.949 94.494,51.949

## Keep-outs
Keep-Out Layer:
  lines w0.254: 3.556,111.76 ccw(c3.746,106.998) -1.016,106.807 -1.016,28.448 ccw(c3.365,28.13) 3.048,23.749 103.759,23.749 ccw(c103.79,28.352) 108.393,28.321 108.393,106.999 ccw(c103.632,106.999) 103.632,111.76 15.748,111.76
  lines w0.257: 3.556,111.76 15.748,111.76
  lines w1: 27.305,101.981 27.305,106.172 ; 32.305,101.981 32.305,106.172 ; 37.305,101.981 37.305,106.172 ; 83.098,101.981 83.098,106.172 ; 88.098,101.981 88.098,106.172 ; 93.098,101.981 93.098,106.172

## Other copper
Component Side:
  rectangle net U2_BMB1: 23.114,102.666 26.416,106.045
  rectangle net U2_BMB2: 28.114,102.666 31.416,106.045
  rectangle net U2_BMA1: 33.114,102.666 36.416,106.045
  rectangle net U2_BMA2: 38.114,102.666 41.416,106.045
  rectangle net U1_BMB2: 83.907,102.666 87.209,106.045
  rectangle net U1_BMA1: 88.907,102.666 92.209,106.045
  rectangle net U1_BMA2: 93.907,102.666 97.209,106.045
  rectangle net U1_BMB1: 78.907,102.666 82.209,106.045
  rectangle net U2_BMA1: 43.815,84.836 47.879,88.646
  rectangle net U2_BMA2: 54.271,84.836 58.335,88.646
  rectangle net U1_BMB1: 67.86,84.582 71.924,88.392
  rectangle net U1_BMA1: 88.646,84.582 92.71,88.392
  rectangle net U1_BMA2: 99.102,84.582 103.166,88.392
  rectangle net DGND: 0.381,87.249 4.191,90.678
  rectangle net DGND: 0.127,49.149 3.937,52.578
  pour cut-out: 99.482,62.992 99.949,62.992 100.203,62.738 100.203,59.014 99.482,58.293
  pour cut-out: 34.371,31.482 34.022,31.482 33.782,31.242 33.782,29.464 33.922,29.324 34.728,29.324
  pour cut-out: 23.749,43.307 22.479,42.037 22.479,34.417 23.495,33.401 25.019,33.401 25.146,33.274 28.321,33.274 30.226,35.179 30.226,41.656 28.575,43.307
  pour cut-out: 89.129,62.611 94.488,62.611 94.742,62.865 94.996,62.611 94.996,62.209 94.636,61.849 89.129,61.849
Bottom Layer:
  rectangle net DGND: 78.113,58.41 83.701,63.871
  rectangle net U2_BMB1: 23.114,102.666 26.416,106.045
  rectangle net U2_BMB2: 28.114,102.666 31.416,106.045
  rectangle net U2_BMA1: 33.114,102.666 36.416,106.045
  rectangle net U2_BMA2: 38.114,102.666 41.416,106.045
  rectangle net U1_BMB1: 78.907,102.666 82.209,106.045
  rectangle net U1_BMB2: 83.907,102.666 87.209,106.045
  rectangle net U1_BMA1: 88.907,102.666 92.209,106.045
  rectangle net U1_BMA2: 93.907,102.666 97.209,106.045
  rectangle net U2_BMB1: 22.606,84.582 26.924,88.392
  rectangle net U2_BMA1: 43.561,84.836 47.879,88.646
  rectangle net U2_BMA2: 54.017,84.836 58.335,88.646
  rectangle net U1_BMB1: 67.606,84.582 71.924,88.392
  rectangle net U1_BMA1: 88.392,84.582 92.71,88.392
  rectangle net U1_BMA2: 98.848,84.582 103.166,88.392
  rectangle net NetC36_1: 15.748,80.645 17.272,88.519
  rectangle net DGND: 35.687,58.293 41.275,63.754
  rectangle net NetC2_1: 60.452,79.248 62.23,88.392
GND (plane layer: these items are gaps in the copper):
  lines w1: -1.016,47.752 53.848,47.752 ; 53.467,47.752 58.166,47.752 66.548,47.752 66.548,33.528 66.548,23.876 ; 93.345,62.23 93.345,62.738
  lines w1.5: 27.686,57.912 27.686,62.103 ; 69.723,57.436 69.723,61.849
VCC (plane layer: these items are gaps in the copper):
  lines w1: -0.889,47.625 57.912,47.625 63.119,47.625 67.945,52.451 94.996,52.451 94.996,33.655 93.472,33.655 66.929,33.655 66.929,23.749 ; 1.905,62.249 74.441,62.249 74.549,62.357 74.549,62.611 74.549,63.118 74.548,63.119 74.548,66.801 74.549,66.802 1.905,66.802 1.905,62.484

## Silkscreen, mask and mechanical layers (free items; w line width, h text height)
Top Overlay:
  text "red  black  yellow  green" at 23.622,109.093 h1
  text "red  black  yellow  green" at 79.415,109.093 h1
  text "GND 24V" at 56.896,96.139 h1
  text "GND" at 60.325,45.212 h1
  text "GND" at 50.165,45.085 h1
  text "RX" at 60.325,42.672 h1
  text "CLK" at 50.165,42.545 h1
  text "DIO" at 50.165,40.132 h1
  text "TX" at 60.325,40.132 h1
  text "VCC" at 50.165,37.465 h1
  text "GND" at 60.325,37.465 h1
  text "H" at 51.562,25.908 h1
  text "L" at 61.725,25.908 h1
Top Solder:
  lines w0.5: 31.432,49.085 32.575,50.228 ; 31.432,50.578 32.575,51.721 ; 31.432,52.07 32.575,53.213 ; 31.751,54.797 33.434,56.427 ; 32.385,53.975 33.528,55.118 ; 48.387,53.848 49.276,54.737 ; 48.895,53.086 49.501,53.692 ; 49.403,52.324 49.784,52.705 ; 56.684,63.669 58.589,65.574 ; 60.06,59.521 61.965,61.426 ; 60.06,61.531 61.965,63.436 ; 60.06,63.542 61.965,65.447 ; 63.436,57.764 65.341,59.669 ; 63.436,59.775 65.341,61.68 ; 63.436,61.785 65.341,63.691 ; 63.436,63.796 65.341,65.701 ; 72.898,53.213 73.787,54.102 73.787,55.012 ; 73.914,52.959 74.676,53.721 74.676,55.372 ; 84.582,56.388 85.344,57.15 ; 84.709,54.864 85.474,55.629 ; 86.995,54.102 87.503,54.61 ; 88.138,54.102 88.646,54.61
  lines w0.6: 19.812,98.044 23.114,98.044 ; 30.226,98.044 33.528,98.044 ; 40.767,98.171 44.069,98.171 ; 51.181,98.171 53.34,98.171 ; 66.167,97.79 67.945,97.79 ; 75.184,97.79 78.486,97.79 ; 85.598,97.79 88.9,97.79 ; 96.139,97.79 99.441,97.79
  lines w1: 25.781,95.504 27.305,97.028 ; 25.908,93.345 27.432,94.869 ; 26.035,91.059 27.559,92.583 ; 36.068,95.504 37.592,97.028 ; 36.195,93.345 37.719,94.869 ; 36.322,91.059 37.846,92.583 ; 46.609,95.631 48.133,97.155 ; 46.736,93.472 48.26,94.996 ; 46.863,91.186 48.387,92.71 ; 57.15,93.98 58.674,95.504 ; 57.277,92.075 58.801,93.599 ; 57.404,90.043 58.928,91.567 ; 60.579,93.98 62.103,95.504 ; 60.706,92.202 62.23,93.726 ; 60.833,90.043 62.357,91.567 ; 70.612,95.25 72.136,96.774 ; 70.739,93.091 72.263,94.615 ; 70.866,90.805 72.39,92.329 ; 80.899,95.123 82.423,96.647 ; 81.026,92.964 82.55,94.488 ; 81.153,90.678 82.677,92.202 ; 91.44,95.25 92.964,96.774 ; 91.567,93.091 93.091,94.615 ; 91.694,90.805 93.218,92.329 ; 101.854,95.377 103.378,96.901 ; 101.981,93.218 103.505,94.742 ; 102.108,90.932 103.632,92.456
Solder Side:
  drawing of 205 lines, arcs and shapes, not listed